# EAGLE board Moist_prong (EAGLE 7.7.0)
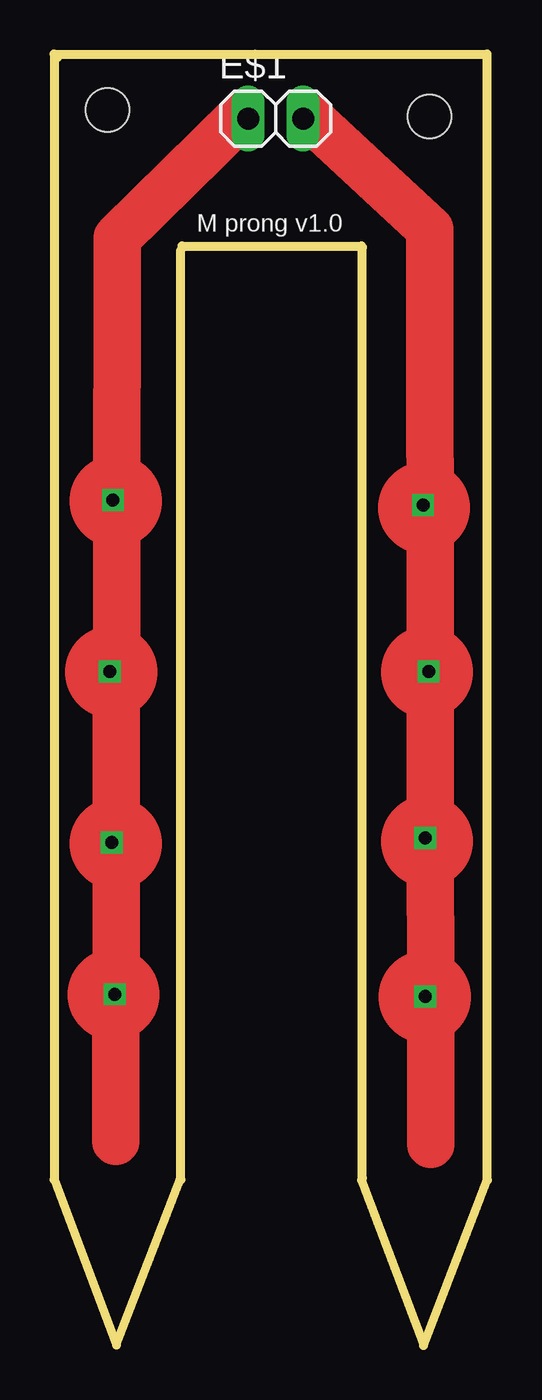
[diagram p0: board, top side]
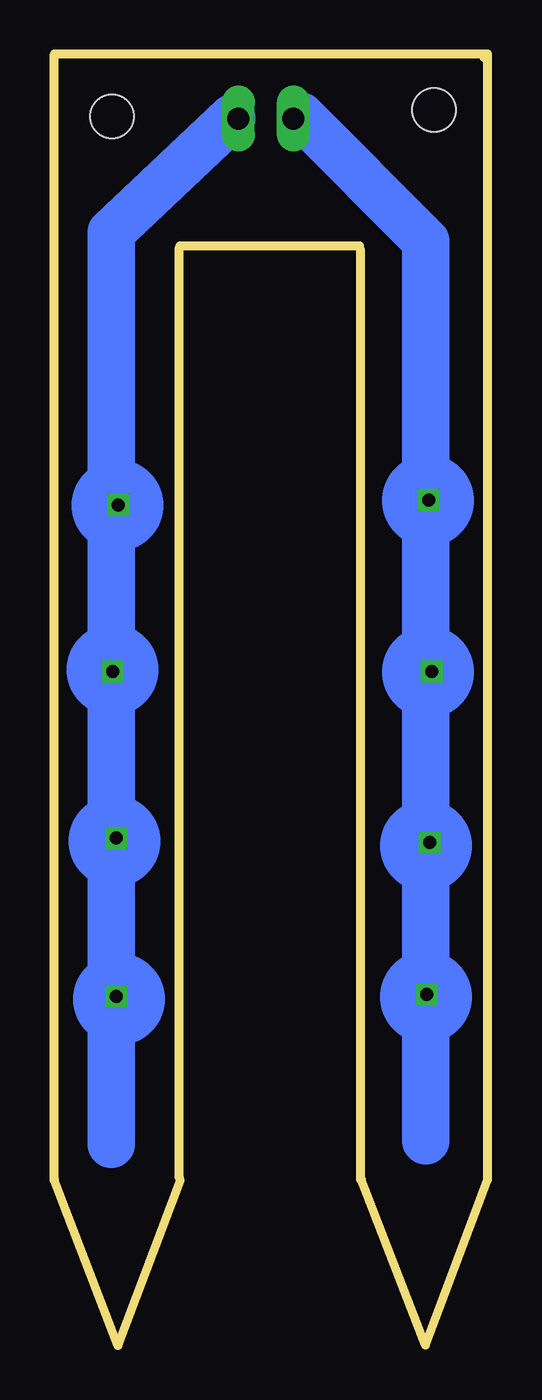
[diagram p1: board, bottom side, seen from below]

Size 20.02 x 59.67 mm. Coordinates in mm from the lower left corner, seen from the top.
Outline: 0,59.67 20,59.67 20,7.67
Outline: 0.15,59.51 0,59.67
Outline: 0,59.67 0,7.67
Outline: 0,7.67 0,7.67
Outline: 14.23,7.72 14.23,50.73
Outline: 5.85,7.67 5.85,50.63
Outline: 5.9,50.8 14.2,50.8
Outline: 0,7.67 2.87,0.03 5.82,7.67
Outline: 14.2,7.65 17.07,0 20.02,7.65
Copper layers (1*16): Top 0.035mm / dielectric 1.5mm / Bottom 0.035mm
Design rules "default": minimum track width 10mil, minimum drill 24mil, track to track 8mil, track to pad 8mil, pad to pad 8mil, via to via 8mil, smd to smd 8mil, copper to edge 40mil, drill to drill 8mil, minimum pad ring 10mil, minimum via ring 8mil, stop-mask expansion 4mil, vias tented up to drill 0mil, thermal gap 10mil
Holes 2 mm at 2.46,57.1 17.35,56.79

## Footprints (pad centres in the part's own frame; a part is rotated, then mirrored left to right if it is on the bottom)
1X02 = drill 1.016 long: 1 -1.27,0; 2 1.27,0

## Placement (x,y rotation side)
E$1  [1X02]  10.24,56.69 0 top

## Library data of the parts
E$1 = pinhead

## Tracks (layer width: path | path; a pad name or v marks a point on that pad's centre or on a via)
S$1
  Bottom 2.184: 2.85,9.45 2.85,51.03 8.61,56.79
S$2
  Top 2.184: 17.4,9.3 17.35,51.59 11.84,56.72
S$3
  Top 2.184: 2.85,9.42 2.92,51.18 8.61,56.79
S$4
  Bottom 2.184: 17.37,9.3 17.37,51.43 11.81,56.72
S$5  (via drill 0.6)
  other vias: 2.72,39.07
S$6  (via drill 0.6)
  other vias: 2.57,31.14
S$7  (via drill 0.6)
  other vias: 2.67,23.24
S$8  (via drill 0.6)
  other vias: 2.79,16.23
S$9  (via drill 0.6)
  other vias: 17.14,16.13
S$10  (via drill 0.6)
  other vias: 17.14,23.44
S$11  (via drill 0.6)
  other vias: 17.3,31.14
S$12  (via drill 0.6)
  other vias: 17.04,38.84
(copper drawn outside any net)
  shapes: Bottom circle x9, Top circle x8

## Text on the board
tPlace: M prong v1.0